# Altium PCB high-spped-thermocouple-logger_panel.PcbDoc (part 1 of 2)
Units mm, origin at the board's own origin, x right, y up, seen from the top; angles counter-clockwise.
Board outline 200.2 x 200.2 mm, 4 copper layers (Top Layer, GND Layer, VCC Layer, Bottom Layer), stack 1.55 mm thick; 2 components, 0 nets, 0 pads, 0 vias.
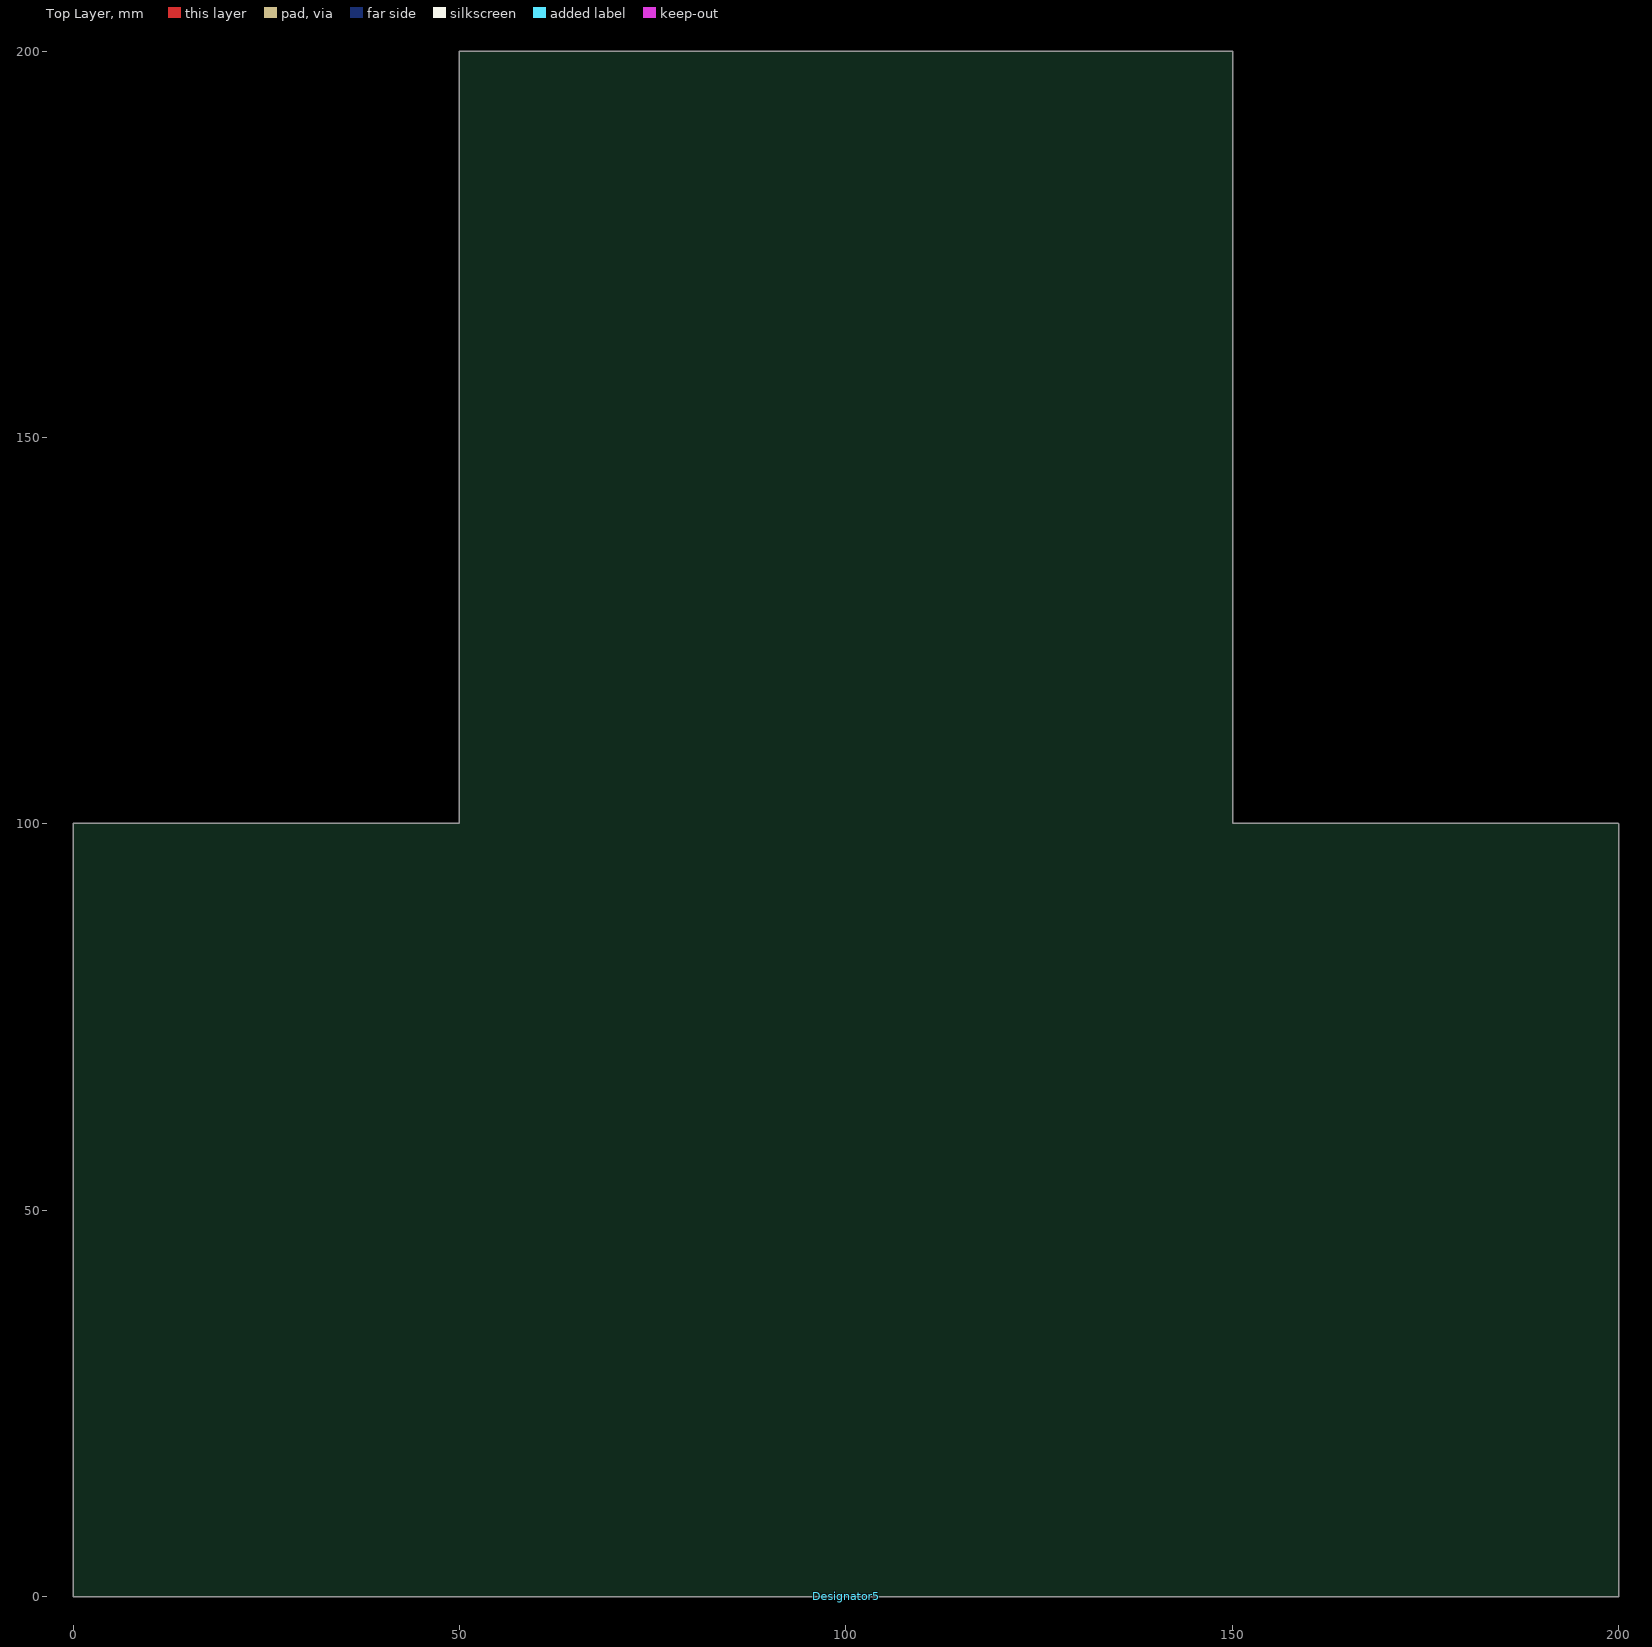
[diagram p0: Top Layer view]
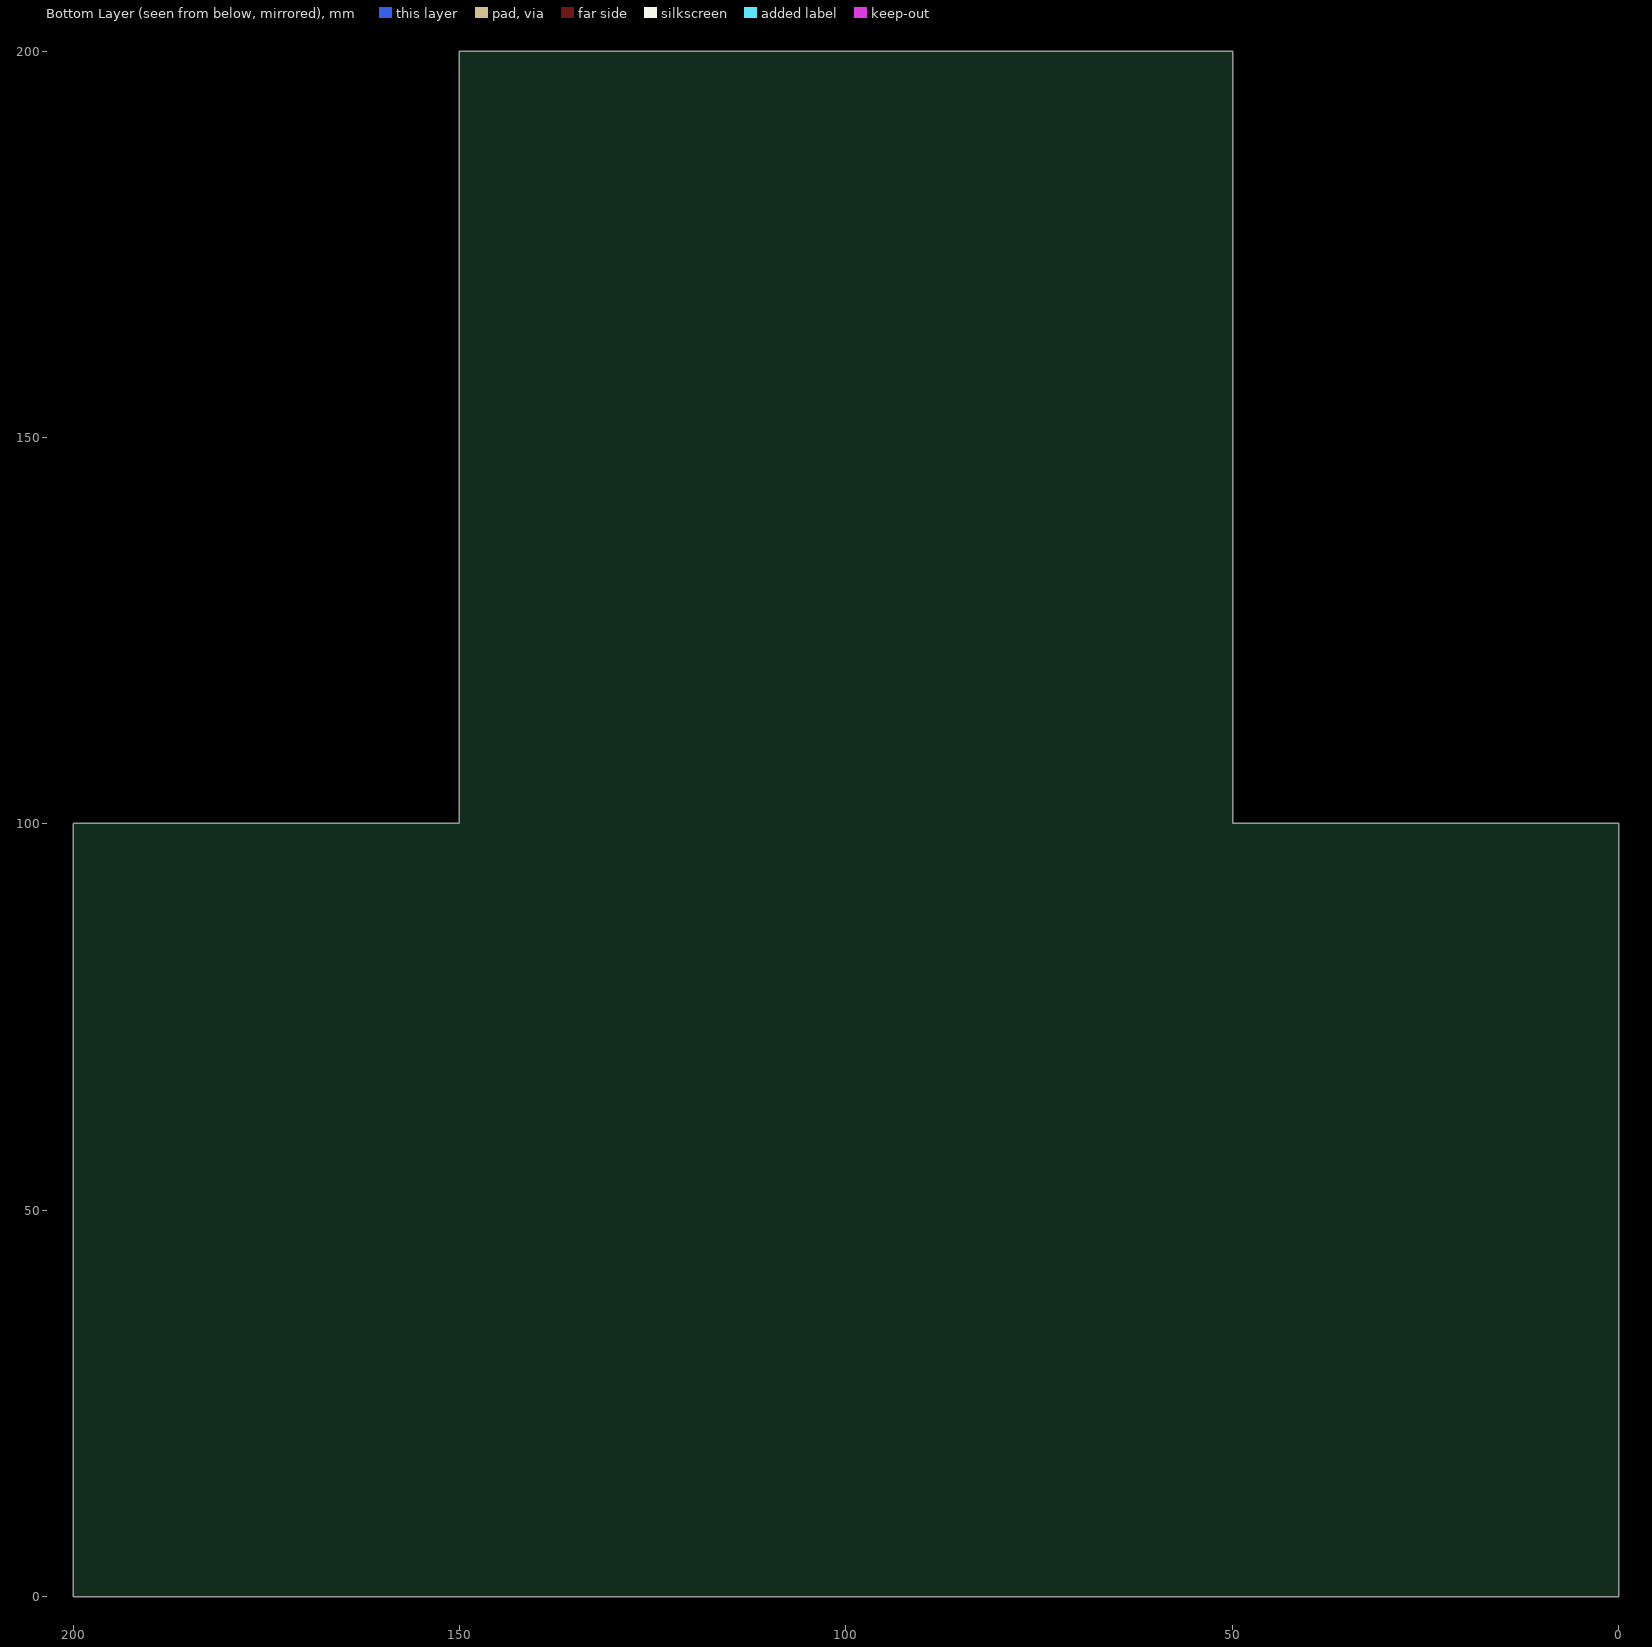
[diagram p1: Bottom Layer view, seen from below]
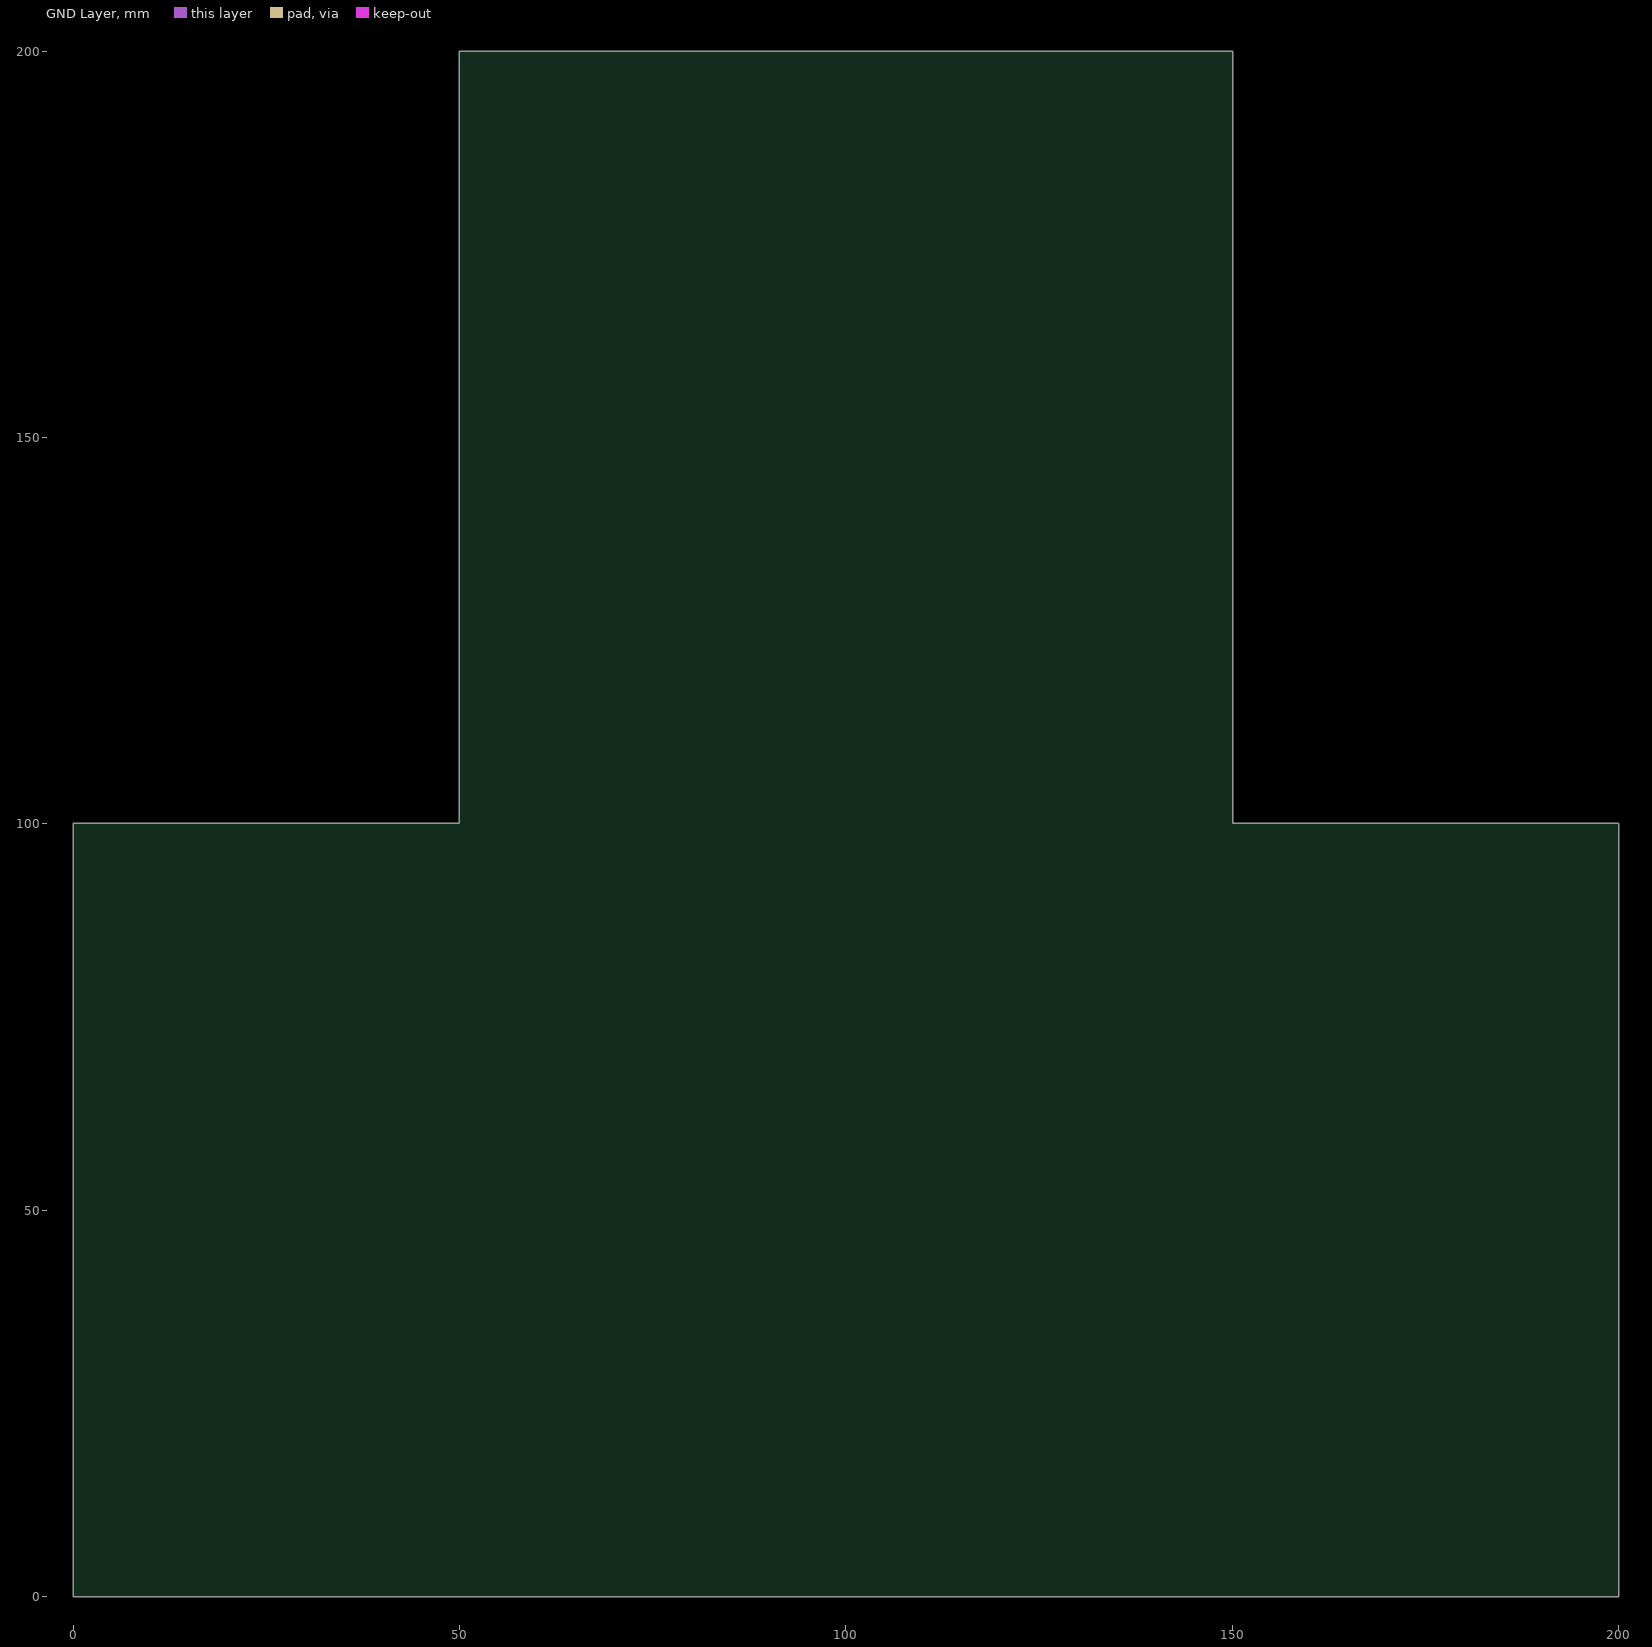
[diagram p2: GND Layer]
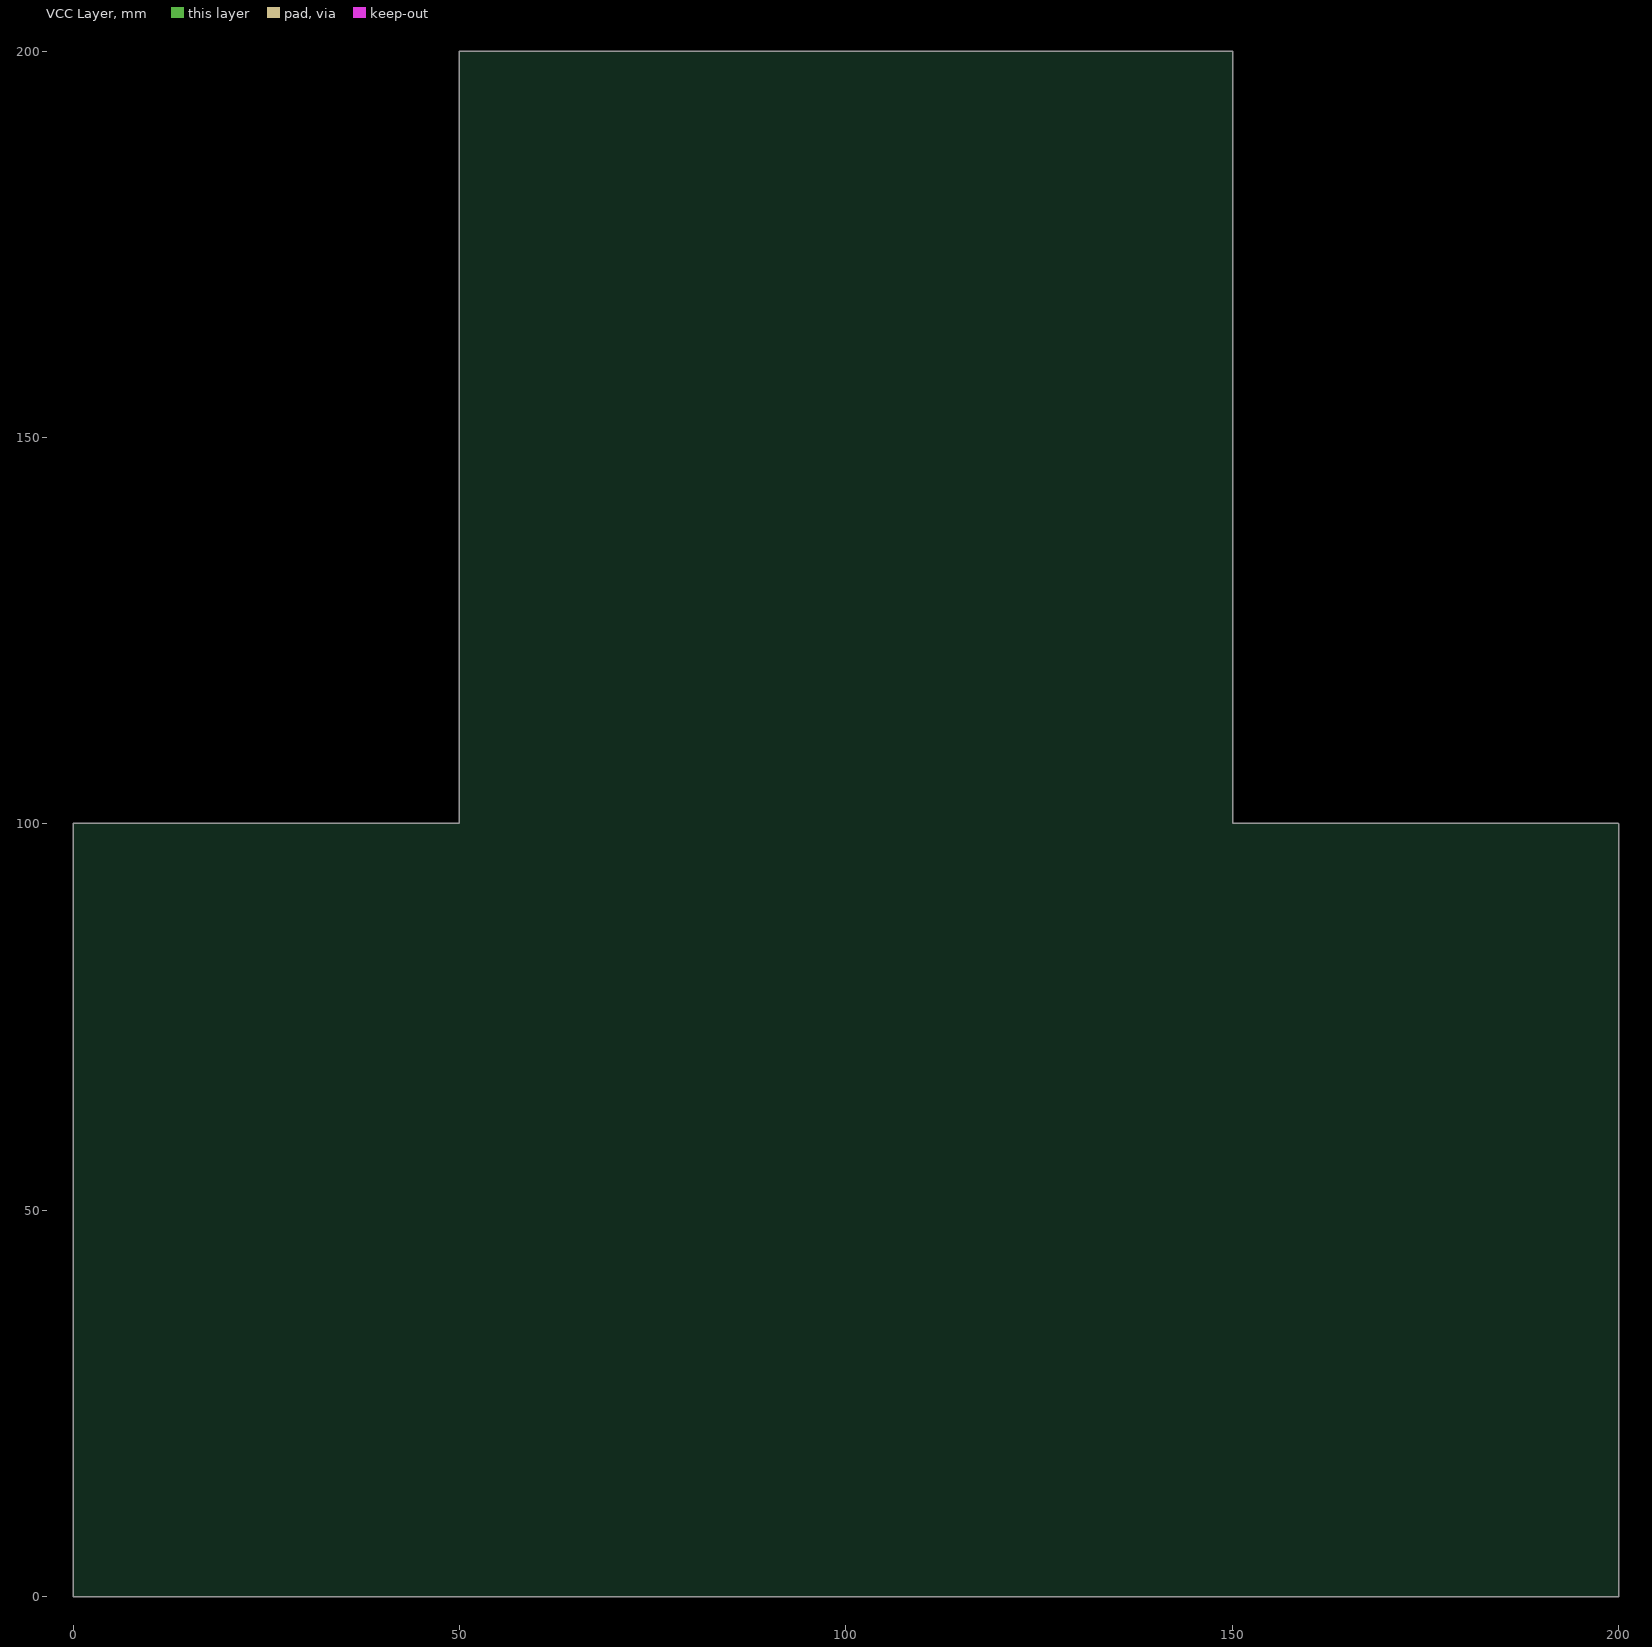
[diagram p3: VCC Layer]

## Layer stack, top to bottom
Top Solder Mask: solder mask 0.005, Solder Resist, Dk 3.5
Top Layer: signal copper 0.035
Dielectric 1: prepreg 0.35, FR-4, Dk 4.2
GND Layer: signal copper 0.035
Dielectric 3: core 0.71, FR-4, Dk 4.2
VCC Layer: signal copper 0.035
Dielectric 2: prepreg 0.35, FR-4, Dk 4.2
Bottom Layer: signal copper 0.035
Bottom Solder Mask: solder mask 0.005, Solder Resist, Dk 3.5

## Board outline
-0.1,0 ccw(c0,0) 0,-0.1 50,-0.1 150,-0.1 200,-0.1 ccw(c200,0) 200.1,0 200.1,100 200,100.1 150.1,100.1 150.1,200 ccw(c150,200) 150,200.1 50,200.1 ccw(c50,200) 49.9,200 49.9,100.1 0,100.1 ccw(c0,100) -0.1,100

## Design rules (kind name [scope] priority, off if disabled: settings)
AssemblyTestPointUsage [All] p1 off: valid=2 // Not used
AssemblyTestpoint AssemblyTestpoint_THT [(IsVia) Or (IsPad And OnMultiLayer)] p1: testpointundercomponent=TRUE minsize=0 maxsize=100 preferedsize=0 minholesize=0 maxholesize=100 preferedholesize=0 testpointgrid=0.025 usegrid=FALSE gridtolerance=0 allowsidetop=TRUE allowsidebottom=TRUE minspacing=2.54 // THT testpoints (component pads)
AssemblyTestpoint AssemblyTestpoint_SMD [(IsPad And (OnTopLayer Or OnBottomLayer)) and not(HasFootprint('FXPSWITCH_PAD') or HasFootprint ('FXPSWITCH_PAD_ALT1'))] p2: testpointundercomponent=TRUE minsize=1 maxsize=100 preferedsize=0 minholesize=0 maxholesize=100 preferedholesize=0 testpointgrid=0.025 usegrid=FALSE gridtolerance=0 allowsidetop=TRUE allowsidebottom=TRUE minspacing=2.54 padholecenterclearance=1 // SMD testpoints except present switch
AssemblyTestpoint [All] p3 off: testpointundercomponent=TRUE minsize=1.016 maxsize=2.54 preferedsize=1.524 minholesize=0 maxholesize=1.016 preferedholesize=0.813 testpointgrid=0.025 usegrid=TRUE gridtolerance=0 allowsidetop=TRUE allowsidebottom=TRUE
BoardOutlineClearance X_BoardOutlineClearance [HasFootprint('MOUSE_BITES_3X_2_4MM') or  HasFootprint('MOUSE_BITES_5X_2_4MM') or HasFootprint('IN_TAB_2_4_EXT')] p1: gap=0 ignorepadtopadclearanceinfootprint=FALSE // Excluded components
BoardOutlineClearance [All] p2: gap=0.3 ignorepadtopadclearanceinfootprint=FALSE
Clearance "NPT Hole" [(InPadClass('NPTH'))] p1: gap=0.3 ignorepadtopadclearanceinfootprint=FALSE except(0: Arc-Hole Track-Hole SMDPad-Hole THPad-Hole Via-Hole Fill-Hole Poly-Hole Region-Hole Text-Hole) // Copper Clearance to NPT Hole
Clearance [All] p2: gap=0.2 ignorepadtopadclearanceinfootprint=FALSE except(0: Arc-Hole Track-Hole SMDPad-Hole THPad-Hole Via-Hole Fill-Hole Poly-Hole Region-Hole Text-Hole)
ComponentClearance [Not (HasFootprint('PASTE_STENCIL')) vs Not (HasFootprint('PASTE_STENCIL'))] p1: gap=0.25 collisioncheckmode=3 verticalgap=0.25 showdistances=TRUE
FabricationTestPointUsage [All] p1 off: valid=0 allowmultiple=FALSE
FabricationTestpoint [All] p1 off: side=3 testpointundercomponent=TRUE minsize=1.016 maxsize=2.54 preferedsize=1.524 minholesize=0 maxholesize=1.016 preferedholesize=0.813 testpointgrid=0.025 allowsidetop=TRUE allowsidebottom=TRUE usegrid=TRUE gridtolerance=0
Height [All] p1: minheight=0 maxheight=80 prefheight=7
HoleSize [All] p1: absolutevalues=TRUE maxlimit=6 minlimit=0.35 maxpercent=80.000 minpercent=20.000
HoleToHoleClearance [All] p1: gap=0.25 allowstackedmicrovias=TRUE
MinimumAnnularRing [All] p1: minimumring=0.2
MinimumSolderMaskSliver [All] p1: minsoldermaskwidth=0.07
PlaneClearance [All] p1: clearance=0.15
PlaneConnect [All] p1: planeconnectstyle=Relief reliefexpansion=0.5 reliefentries=4 reliefconductorwidth=0.25 reliefairgap=0.25
PolygonConnect "Via Connect" [IsVia] p1: connectstyle=Direct reliefconductorwidth=0.254 reliefentries=4 polygonreliefangle="90 Angle" airgapwidth=0.254 // Via connection style
PolygonConnect [All] p2: connectstyle=Relief reliefconductorwidth=0.25 reliefentries=4 polygonreliefangle="90 Angle" airgapwidth=0.25
RoutingCorners [All] p1: cornerstyle=45-Degree minsetback=2.5 maxsetback=2.5
RoutingVias [All] p1: holewidth=0.4 width=0.8 viastyle="Through Hole" minholewidth=0.2 minwidth=0.6 maxholewidth=1 maxwidth=1.6 useviatemplates=TRUE viatemplateguid#1={26E1B80A-D5C0-4505-9623-F9CB59458B7C} viatemplateguid#2={36E1CC21-96E2-49A4-88B6-F2B68A4AE673} viatemplateguid#3={0111366E-BFF6-48C7-B537-6C96D691991D} viatemplateguid#4={0E0C0ADB-85E7-4A3B-837A-9DB01CC425C1} viatemplateguid#5={2AE59D33-7222-4D26-9EBE-4F327D78EEDC} viatemplateguid#6={04F958C5-3098-48F3-841F-9266846BFB57} viatemplateguid#7={3EBD0A92-59C6-4A03-9F1B-9C85124118A6} viatemplateguid#8={D374DE30-929E-4757-A35D-CCDF97954E77} viatemplateguid#9={7387BB7D-B2C7-482F-BFEA-A07FA82CF54E} viatemplatename#1=v50h15m22 viatemplatename#2=v60h20m28 viatemplatename#3=v80h40m48 viatemplatename#4=v110h70m78 viatemplatename#5=v140h90 viatemplatename#6=v160h100m108 viatemplatename#7=v170h110 viatemplatename#8=v200h130 viatemplatename#9=v260h150
SMDEntry [All] p1: side=TRUE corner=FALSE anyangle=FALSE
SMDEntry ResistorArray_Exit [HasFootprint('CAC-50P200X100-8M')] p2: side=TRUE corner=FALSE anyangle=FALSE
SMDToCorner ResistorArray_NeckDown [HasFootprint('CAC-50P200X100-8M')] p1: distance=78740
SilkToSilkClearance [All] p1: silktosilkclearance=0.1
SilkToSolderMaskClearance [IsPad] p1: minsilkscreentomaskgap=0.1 clearancetoexposedcopper=FALSE
SolderMaskExpansion "PTH Via" [IsVia] p1: expansion=0.075 istentingtop=FALSE soldermaskfromhole=TRUE
SolderMaskExpansion [All] p2: expansion=0.1 istentingtop=FALSE
Width [All] p1: maxlimit=5 minlimit=0.15 preferedwidth=0.3
16 further rules are at their usual default settings.

## Components (designator, comment, footprint, x,y, rotation, side; value= is the part's Value field where it differs from the comment)
Designator4 "Comment" PCB_INFO_4L 0,-42 r0 top
Designator5 "Comment" PASTE_STENCIL 100,0 r0 top

## Footprints (in the part's own frame and the unit in brackets; to place one, negate y for a bottom-side part, rotate by r counter-clockwise, add the part's x,y. Pads: shape width x height; smd on the part's side, far side on the other; paste and mask are expansions set on the pad)
PASTE_STENCIL [mm] "Solder Paste Stencil"
PCB_INFO_4L [mm] "PCB Info table for 4L PCB, with additional info."

## Part data
Designator4: library part 000-TABPCB100
Designator5: library part 000-STENCIL100

## Nets (pads, with @x,y where several pads share a name; then routed paths per layer and width w, separated by ;. In a path a pad name is that pad's centre, name@x,y a point inside that pad or via, vN(x,y) a via of type N, cw(c..) or ccw(c..) an arc to the next point about the centre after c; other vN are vias at no path point)

## Silkscreen, mask and mechanical layers (free items; w line width, h text height)
Route Tool Path:
  lines w0.5: 100,0 150,0 ; 150,0 50,0 0,0 0,100 50,100 50,200 150,200 150,100 200,100 200,0 150,0
Mfg Info:
  drawing of 168 lines, arcs and shapes, not listed
  text "Layer" at 1.968,-53.17 h1.52
  text "Name" at 12.38,-53.17 h1.52
  text "Material" at 41.836,-53.17 h1.52
  text "Thickness" at 63.674,-53.17 h1.52
  text "Constant" at 80.18,-53.17 h1.52
  text "Top Silkscreen" at 12.38,-56.218 h1.52
  text "Top Solder Mask" at 12.38,-59.266 h1.52
  text "Solder Resist" at 41.836,-59.266 h1.52
  text "0.005mm" at 63.674,-59.266 h1.52
  text "3.5" at 80.18,-59.266 h1.52
  text "1" at 1.968,-62.314 h1.52
  text "Top Layer" at 12.38,-62.314 h1.52
  text "0.035mm" at 63.674,-62.314 h1.52
  text "Dielectric 1" at 12.38,-65.362 h1.52
  text "FR-4" at 41.836,-65.362 h1.52
  text "0.350mm" at 63.674,-65.362 h1.52
  text "4.2" at 80.18,-65.362 h1.52
  text "2" at 1.968,-68.41 h1.52
  text "GND Layer" at 12.38,-68.41 h1.52
  text "0.035mm" at 63.674,-68.41 h1.52
  text "Dielectric 3" at 12.38,-71.458 h1.52
  text "FR-4" at 41.836,-71.458 h1.52
  text "0.710mm" at 63.674,-71.458 h1.52
  text "4.2" at 80.18,-71.458 h1.52
  text "3" at 1.968,-74.506 h1.52
  text "VCC Layer" at 12.38,-74.506 h1.52
  text "0.035mm" at 63.674,-74.506 h1.52
  text "Dielectric 2" at 12.38,-77.554 h1.52
  text "FR-4" at 41.836,-77.554 h1.52
  text "0.350mm" at 63.674,-77.554 h1.52
  text "4.2" at 80.18,-77.554 h1.52
  text "4" at 1.968,-80.602 h1.52
  text "Bottom Layer" at 12.38,-80.602 h1.52
  text "0.035mm" at 63.674,-80.602 h1.52
  text "Bottom Solder Mask" at 12.38,-83.65 h1.52
  text "Solder Resist" at 41.836,-83.65 h1.52
  text "0.005mm" at 63.674,-83.65 h1.52
  text "3.5" at 80.18,-83.65 h1.52
  text "Bottom Silkscreen" at 12.38,-86.698 h1.52
  text "Total board thickness:" at 1.968,-89.746 h1.52
  text "1.560mm" at 63.674,-89.746 h1.52
  text "P" at 138.774,-119.59 h1.73
  text "A" at 139.503,-119.59 h1.73
  text "N" at 140.314,-119.59 h1.73
  text "E" at 141.286,-119.59 h1.73
  text "L" at 142.015,-119.59 h1.73
  text "T" at 142.988,-119.59 h1.73
  text "H" at 143.717,-119.59 h1.73
  text "I" at 144.608,-119.59 h1.73
  text "C" at 145.013,-119.59 h1.73
  text "K" at 145.824,-119.59 h1.73
  text "N" at 146.553,-119.59 h1.73
  text "E" at 147.525,-119.59 h1.73
  text "S" at 148.255,-119.59 h1.73
  text "S" at 148.903,-119.59 h1.73
  text "A" at 163.002,-119.59 h1.73
  text "P" at 163.812,-119.59 h1.73
  text "P" at 164.541,-119.59 h1.73
  text "R" at 165.271,-119.59 h1.73
  text "O" at 166.081,-119.59 h1.73
  text "X" at 167.053,-119.59 h1.73
  text "I" at 167.783,-119.59 h1.73
  text "M" at 168.188,-119.59 h1.73
  text "A" at 169.403,-119.59 h1.73
  text "T" at 170.214,-119.59 h1.73
  text "E" at 170.943,-119.59 h1.73
  text "C" at 138.774,-122.426 h1.73
  text "O" at 139.584,-122.426 h1.73
  text "P" at 140.557,-122.426 h1.73
  text "P" at 141.286,-122.426 h1.73
  text "E" at 142.015,-122.426 h1.73
  text "R" at 142.745,-122.426 h1.73
  text "T" at 143.879,-122.426 h1.73
  text "H" at 144.608,-122.426 h1.73
  text "I" at 145.5,-122.426 h1.73
  text "C" at 145.905,-122.426 h1.73
  text "K" at 146.715,-122.426 h1.73
  text "N" at 147.444,-122.426 h1.73
  text "E" at 148.417,-122.426 h1.73
  text "S" at 149.146,-122.426 h1.73
  text "S" at 149.794,-122.426 h1.73
  text "F" at 163.002,-122.426 h1.73
  text "I" at 163.65,-122.426 h1.73
  text "N" at 164.055,-122.426 h1.73
  text "A" at 165.028,-122.426 h1.73
  text "L" at 165.838,-122.426 h1.73
  text "(" at 166.81,-122.426 h1.73
  text "A" at 167.215,-122.426 h1.73
  text "F" at 168.026,-122.426 h1.73
  text "T" at 168.674,-122.426 h1.73
  text "E" at 169.403,-122.426 h1.73
  text "R" at 170.133,-122.426 h1.73
  text "P" at 171.267,-122.426 h1.73
  text "L" at 171.996,-122.426 h1.73
  text "A" at 172.644,-122.426 h1.73
  text "T" at 173.455,-122.426 h1.73
  text "I" at 174.184,-122.426 h1.73
  text "N" at 174.589,-122.426 h1.73
  text "G" at 175.562,-122.426 h1.73
  text ")" at 176.453,-122.426 h1.73
  text "I" at 138.774,-125.262 h1.73
  text "N" at 139.179,-125.262 h1.73
  text "S" at 140.152,-125.262 h1.73
  text "U" at 140.8,-125.262 h1.73
  text "L" at 141.772,-125.262 h1.73
  text "A" at 142.421,-125.262 h1.73
  text "T" at 143.231,-125.262 h1.73
  text "I" at 143.96,-125.262 h1.73
  text "O" at 144.365,-125.262 h1.73
  text "N" at 145.338,-125.262 h1.73
  text "M" at 146.634,-125.262 h1.73
  text "A" at 147.85,-125.262 h1.73
  text "T" at 148.66,-125.262 h1.73
  text "E" at 149.389,-125.262 h1.73
  text "R" at 150.118,-125.262 h1.73
  text "I" at 150.929,-125.262 h1.73
  text "A" at 151.334,-125.262 h1.73
  text "L" at 152.144,-125.262 h1.73
  text "T" at 153.117,-125.262 h1.73
  text "H" at 153.846,-125.262 h1.73
  text "I" at 154.737,-125.262 h1.73
  text "C" at 155.142,-125.262 h1.73
  text "K" at 155.953,-125.262 h1.73
  text "N" at 156.682,-125.262 h1.73
  text "E" at 157.654,-125.262 h1.73
  text "S" at 158.383,-125.262 h1.73
  text "S" at 159.032,-125.262 h1.73
  text "R" at 163.002,-125.262 h1.73
  text "E" at 163.812,-125.262 h1.73
  text "C" at 164.541,-125.262 h1.73
  text "O" at 165.352,-125.262 h1.73
  text "M" at 166.324,-125.262 h1.73
  text "M" at 167.54,-125.262 h1.73
  text "E" at 168.755,-125.262 h1.73
  text "N" at 169.484,-125.262 h1.73
  text "D" at 170.457,-125.262 h1.73
  text "E" at 171.348,-125.262 h1.73
  text "D" at 172.077,-125.262 h1.73
  text "D" at 138.774,-128.099 h1.73
  text "I" at 139.665,-128.099 h1.73
  text "E" at 140.071,-128.099 h1.73
  text "L" at 140.8,-128.099 h1.73
  text "E" at 141.448,-128.099 h1.73
  text "C" at 142.177,-128.099 h1.73
  text "T" at 142.988,-128.099 h1.73
  text "R" at 143.717,-128.099 h1.73
  text "I" at 144.527,-128.099 h1.73
  text "C" at 144.932,-128.099 h1.73
  text "C" at 146.067,-128.099 h1.73
  text "O" at 146.877,-128.099 h1.73
  text "N" at 147.85,-128.099 h1.73
  text "S" at 148.822,-128.099 h1.73
  text "T" at 149.47,-128.099 h1.73
  text "A" at 150.199,-128.099 h1.73
  text "N" at 151.01,-128.099 h1.73
  text "T" at 151.982,-128.099 h1.73
  text "S" at 152.711,-128.099 h1.73
  text "A" at 163.002,-128.099 h1.73
  text "P" at 163.812,-128.099 h1.73
  text "P" at 164.541,-128.099 h1.73
  text "R" at 165.271,-128.099 h1.73
  text "O" at 166.081,-128.099 h1.73
  text "X" at 167.053,-128.099 h1.73
  text "I" at 167.783,-128.099 h1.73
  text "M" at 168.188,-128.099 h1.73
  text "A" at 169.403,-128.099 h1.73
  text "T" at 170.214,-128.099 h1.73
  text "E" at 170.943,-128.099 h1.73
  text "M" at 138.774,-130.935 h1.73
  text "A" at 139.99,-130.935 h1.73
  text "T" at 140.8,-130.935 h1.73
  text "E" at 141.529,-130.935 h1.73
  text "R" at 142.258,-130.935 h1.73
  text "I" at 143.069,-130.935 h1.73
  text "A" at 143.474,-130.935 h1.73
  text "L" at 144.284,-130.935 h1.73
  text "S" at 144.932,-130.935 h1.73
  text "I" at 145.905,-130.935 h1.73
  text "N" at 146.31,-130.935 h1.73
  text "S" at 147.606,-130.935 h1.73
  text "T" at 148.255,-130.935 h1.73
  text "A" at 148.984,-130.935 h1.73
  text "C" at 149.794,-130.935 h1.73
  text "K" at 150.605,-130.935 h1.73
  text "U" at 151.334,-130.935 h1.73
  text "P" at 152.306,-130.935 h1.73
  text "T" at 153.36,-130.935 h1.73
  text "A" at 154.089,-130.935 h1.73
  text "B" at 154.899,-130.935 h1.73
  text "L" at 155.709,-130.935 h1.73
  text "E" at 156.358,-130.935 h1.73
  text "R" at 163.002,-130.935 h1.73
  text "E" at 163.812,-130.935 h1.73
  text "C" at 164.541,-130.935 h1.73
  text "O" at 165.352,-130.935 h1.73
  text "M" at 166.324,-130.935 h1.73
  text "M" at 167.54,-130.935 h1.73
  text "E" at 168.755,-130.935 h1.73
  text "N" at 169.484,-130.935 h1.73
  text "D" at 170.457,-130.935 h1.73
  text "E" at 171.348,-130.935 h1.73
  text "D" at 172.077,-130.935 h1.73
  text "U" at 138.774,-133.771 h1.73
  text "S" at 139.747,-133.771 h1.73
  text "E" at 140.395,-133.771 h1.73
  text "O" at 141.448,-133.771 h1.73
  text "N" at 142.421,-133.771 h1.73
  text "L" at 143.393,-133.771 h1.73
  text "Y" at 144.041,-133.771 h1.73
  text "U" at 145.095,-133.771 h1.73
  text "L" at 146.067,-133.771 h1.73
  text "9" at 146.715,-133.771 h1.73
  text "4" at 147.444,-133.771 h1.73
  text "V" at 148.498,-133.771 h1.73
  text "-" at 149.308,-133.771 h1.73
  text "0" at 149.794,-133.771 h1.73
  text "M" at 150.848,-133.771 h1.73
  text "A" at 152.063,-133.771 h1.73
  text "T" at 152.873,-133.771 h1.73
  text "E" at 153.603,-133.771 h1.73
  text "R" at 154.332,-133.771 h1.73
  text "I" at 155.142,-133.771 h1.73
  text "A" at 155.547,-133.771 h1.73
  text "L" at 156.358,-133.771 h1.73
  text "M" at 163.002,-133.771 h1.73
  text "A" at 164.217,-133.771 h1.73
  text "N" at 165.028,-133.771 h1.73
  text "D" at 166,-133.771 h1.73
  text "A" at 166.891,-133.771 h1.73
  text "T" at 167.702,-133.771 h1.73
  text "O" at 168.431,-133.771 h1.73
  text "R" at 169.403,-133.771 h1.73
  text "Y" at 170.214,-133.771 h1.73
  text "B" at 138.774,-136.607 h1.73
  text "O" at 139.584,-136.607 h1.73
  text "A" at 140.557,-136.607 h1.73
  text "R" at 141.367,-136.607 h1.73
  text "D" at 142.177,-136.607 h1.73
  text "F" at 143.393,-136.607 h1.73
  text "I" at 144.041,-136.607 h1.73
  text "N" at 144.446,-136.607 h1.73
  text "I" at 145.419,-136.607 h1.73
  text "S" at 145.824,-136.607 h1.73
  text "H" at 146.472,-136.607 h1.73
  text "L" at 163.002,-136.607 h1.73
  text "E" at 163.65,-136.607 h1.73
  text "A" at 164.379,-136.607 h1.73
  text "D" at 165.19,-136.607 h1.73
  text "F" at 166.405,-136.607 h1.73
  text "R" at 167.053,-136.607 h1.73
  text "E" at 167.864,-136.607 h1.73
  text "E" at 168.593,-136.607 h1.73
  text "H" at 169.646,-136.607 h1.73
  text "A" at 170.538,-136.607 h1.73
  text "L" at 171.348,-136.607 h1.73
  text "S" at 138.774,-139.443 h1.73
  text "O" at 139.422,-139.443 h1.73
  text "L" at 140.395,-139.443 h1.73
  text "D" at 141.043,-139.443 h1.73
  text "E" at 141.934,-139.443 h1.73
  text "R" at 142.664,-139.443 h1.73
  text "M" at 143.474,-139.443 h1.73
  text "A" at 144.689,-139.443 h1.73
  text "S" at 145.5,-139.443 h1.73
  text "K" at 146.148,-139.443 h1.73
  text "G" at 163.002,-139.443 h1.73
  text "R" at 163.893,-139.443 h1.73
  text "E" at 164.703,-139.443 h1.73
  text "E" at 165.433,-139.443 h1.73
  text "N" at 166.162,-139.443 h1.73
  text "," at 167.134,-139.443 h1.73
  text "B" at 167.783,-139.443 h1.73
  text "O" at 168.593,-139.443 h1.73
  text "T" at 169.565,-139.443 h1.73
  text "H" at 170.295,-139.443 h1.73
  text "S" at 171.51,-139.443 h1.73
  text "I" at 172.158,-139.443 h1.73
  text "D" at 172.563,-139.443 h1.73
  text "E" at 173.455,-139.443 h1.73
  text "S" at 174.184,-139.443 h1.73
  text "S" at 138.774,-142.279 h1.73
  text "O" at 139.422,-142.279 h1.73
  text "L" at 140.395,-142.279 h1.73
  text "D" at 141.043,-142.279 h1.73
  text "E" at 141.934,-142.279 h1.73
  text "R" at 142.664,-142.279 h1.73
  text "M" at 143.798,-142.279 h1.73
  text "A" at 145.013,-142.279 h1.73
  text "S" at 145.824,-142.279 h1.73
  text "K" at 146.472,-142.279 h1.73
  text "C" at 147.525,-142.279 h1.73
  text "L" at 148.336,-142.279 h1.73
  text "E" at 148.984,-142.279 h1.73
  text "A" at 149.713,-142.279 h1.73
  text "R" at 150.524,-142.279 h1.73
  text "A" at 151.334,-142.279 h1.73
  text "N" at 152.144,-142.279 h1.73
  text "C" at 153.117,-142.279 h1.73
  text "E" at 153.927,-142.279 h1.73
  text "S" at 154.656,-142.279 h1.73
  text "F" at 155.628,-142.279 h1.73
  text "O" at 156.277,-142.279 h1.73
  text "R" at 157.249,-142.279 h1.73
  text "V" at 158.383,-142.279 h1.73
  text "I" at 159.194,-142.279 h1.73
  text "A" at 159.599,-142.279 h1.73
  text "S" at 160.409,-142.279 h1.73
  text "R" at 163.002,-142.279 h1.73
  text "E" at 163.812,-142.279 h1.73
  text "C" at 164.541,-142.279 h1.73
  text "O" at 165.352,-142.279 h1.73
  text "M" at 166.324,-142.279 h1.73
  text "M" at 167.54,-142.279 h1.73
  text "E" at 168.755,-142.279 h1.73
  text "N" at 169.484,-142.279 h1.73
  text "D" at 170.457,-142.279 h1.73
  text "E" at 171.348,-142.279 h1.73
  text "D" at 172.077,-142.279 h1.73
  text "M" at 138.774,-145.196 h1.73
  text "A" at 139.99,-145.196 h1.73
  text "X" at 140.8,-145.196 h1.73
  text "I" at 141.529,-145.196 h1.73
  text "M" at 141.934,-145.196 h1.73
  text "U" at 143.15,-145.196 h1.73
  text "M" at 144.122,-145.196 h1.73
  text "C" at 145.662,-145.196 h1.73
  text "L" at 146.472,-145.196 h1.73
  text "E" at 147.12,-145.196 h1.73
  text "A" at 147.85,-145.196 h1.73
  text "R" at 148.66,-145.196 h1.73
  text "A" at 149.47,-145.196 h1.73
  text "N" at 150.28,-145.196 h1.73
  text "C" at 151.253,-145.196 h1.73
  text "E" at 152.063,-145.196 h1.73
  text "O" at 153.117,-145.196 h1.73
  text "F" at 154.089,-145.196 h1.73
  text "S" at 155.061,-145.196 h1.73
  text "O" at 155.709,-145.196 h1.73
  text "L" at 156.682,-145.196 h1.73
  text "D" at 157.33,-145.196 h1.73
  text "E" at 158.221,-145.196 h1.73
  text "R" at 158.951,-145.196 h1.73
  text "1" at 163.002,-146.168 h1.73
  text "5" at 163.731,-146.168 h1.73
  text "0" at 164.46,-146.168 h1.73
  text "U" at 165.514,-146.168 h1.73
  text "M" at 166.486,-146.168 h1.73
  text "I" at 168.026,-146.168 h1.73
  text "F" at 168.431,-146.168 h1.73
  text "N" at 169.403,-146.168 h1.73
  text "O" at 170.376,-146.168 h1.73
  text "T" at 171.348,-146.168 h1.73
  text "S" at 172.401,-146.168 h1.73
  text "P" at 173.05,-146.168 h1.73
  text "E" at 173.779,-146.168 h1.73
  text "C" at 174.508,-146.168 h1.73
  text "I" at 175.318,-146.168 h1.73
  text "F" at 175.724,-146.168 h1.73
  text "I" at 176.372,-146.168 h1.73
  text "E" at 176.777,-146.168 h1.73
  text "D" at 177.506,-146.168 h1.73
  text "O" at 178.722,-146.168 h1.73
  text "T" at 179.694,-146.168 h1.73
  text "H" at 180.423,-146.168 h1.73
  text "E" at 181.315,-146.168 h1.73
  text "R" at 182.044,-146.168 h1.73
  text "W" at 182.854,-146.168 h1.73
  text "I" at 184.151,-146.168 h1.73
  text "S" at 184.556,-146.168 h1.73
  text "E" at 185.204,-146.168 h1.73
  text "M" at 138.774,-147.141 h1.73
  text "A" at 139.99,-147.141 h1.73
  text "S" at 140.8,-147.141 h1.73
  text "K" at 141.448,-147.141 h1.73
  text "F" at 142.502,-147.141 h1.73
  text "R" at 143.15,-147.141 h1.73
  text "O" at 143.96,-147.141 h1.73
  text "M" at 144.932,-147.141 h1.73
  text "V" at 146.472,-147.141 h1.73
  text "I" at 147.282,-147.141 h1.73
  text "A" at 147.687,-147.141 h1.73
  text "F" at 148.822,-147.141 h1.73
  text "I" at 149.47,-147.141 h1.73
  text "N" at 149.875,-147.141 h1.73
  text "A" at 150.848,-147.141 h1.73
  text "L" at 151.658,-147.141 h1.73
  text "H" at 152.63,-147.141 h1.73
  text "O" at 153.522,-147.141 h1.73
  text "L" at 154.494,-147.141 h1.73
  text "E" at 155.142,-147.141 h1.73
  text "E" at 156.196,-147.141 h1.73
  text "D" at 156.925,-147.141 h1.73
  text "G" at 157.816,-147.141 h1.73
  text "E" at 158.708,-147.141 h1.73
  text "R" at 138.774,-150.058 h1.73
  text "E" at 139.584,-150.058 h1.73
  text "M" at 140.314,-150.058 h1.73
  text "O" at 141.529,-150.058 h1.73
  text "V" at 142.502,-150.058 h1.73
  text "I" at 143.312,-150.058 h1.73
  text "N" at 143.717,-150.058 h1.73
  text "G" at 144.689,-150.058 h1.73
  text "S" at 145.905,-150.058 h1.73
  text "O" at 146.553,-150.058 h1.73
  text "L" at 147.525,-150.058 h1.73
  text "D" at 148.174,-150.058 h1.73
  text "E" at 149.065,-150.058 h1.73
  text "R" at 149.794,-150.058 h1.73
  text "M" at 150.605,-150.058 h1.73
  text "A" at 151.82,-150.058 h1.73
  text "S" at 152.63,-150.058 h1.73
  text "K" at 153.279,-150.058 h1.73
  text "B" at 154.332,-150.058 h1.73
  text "E" at 155.142,-150.058 h1.73
  text "T" at 155.872,-150.058 h1.73
  text "W" at 156.601,-150.058 h1.73
  text "E" at 157.897,-150.058 h1.73
  text "E" at 158.627,-150.058 h1.73
  text "N" at 159.356,-150.058 h1.73
  text "P" at 163.002,-151.03 h1.73
  text "O" at 163.731,-151.03 h1.73
  text "S" at 164.703,-151.03 h1.73
  text "S" at 165.352,-151.03 h1.73
  text "I" at 166,-151.03 h1.73
  text "B" at 166.405,-151.03 h1.73
  text "L" at 167.215,-151.03 h1.73
  text "E" at 167.864,-151.03 h1.73
  text "I" at 168.917,-151.03 h1.73
  text "F" at 169.322,-151.03 h1.73
  text "T" at 170.295,-151.03 h1.73
  text "H" at 171.024,-151.03 h1.73
  text "E" at 171.915,-151.03 h1.73
  text "P" at 172.969,-151.03 h1.73
  text "A" at 173.698,-151.03 h1.73
  text "D" at 174.508,-151.03 h1.73
  text "S" at 175.724,-151.03 h1.73
  text "P" at 176.372,-151.03 h1.73
  text "A" at 177.101,-151.03 h1.73
  text "C" at 177.911,-151.03 h1.73
  text "I" at 178.722,-151.03 h1.73
  text "N" at 179.127,-151.03 h1.73
  text "G" at 180.099,-151.03 h1.73
  text "(" at 181.315,-151.03 h1.73
  text "C" at 181.72,-151.03 h1.73
  text "L" at 182.53,-151.03 h1.73
  text "E" at 183.178,-151.03 h1.73
  text "A" at 183.908,-151.03 h1.73
  text "R" at 184.718,-151.03 h1.73
  text "A" at 185.528,-151.03 h1.73
  text "N" at 186.339,-151.03 h1.73
  text "C" at 187.311,-151.03 h1.73
  text "E" at 188.121,-151.03 h1.73
  text ")" at 188.851,-151.03 h1.73
  text "I" at 189.58,-151.03 h1.73
  text "S" at 189.985,-151.03 h1.73
  text "L" at 190.957,-151.03 h1.73
  text "E" at 191.606,-151.03 h1.73
  text "S" at 192.335,-151.03 h1.73
  text "S" at 192.983,-151.03 h1.73
  text "T" at 193.955,-151.03 h1.73
  text "H" at 194.685,-151.03 h1.73
  text "A" at 195.576,-151.03 h1.73
  text "N" at 196.386,-151.03 h1.73
  text "0" at 197.683,-151.03 h1.73
  text "." at 198.412,-151.03 h1.73
  text "2" at 198.817,-151.03 h1.73
  text "9" at 199.547,-151.03 h1.73
  text "M" at 200.6,-151.03 h1.73
  text "M" at 201.815,-151.03 h1.73
  text "T" at 138.774,-152.003 h1.73
  text "H" at 139.503,-152.003 h1.73
  text "E" at 140.395,-152.003 h1.73
  text "C" at 141.448,-152.003 h1.73
  text "O" at 142.258,-152.003 h1.73
  text "M" at 143.231,-152.003 h1.73
  text "P" at 144.446,-152.003 h1.73
  text "O" at 145.176,-152.003 h1.73
  text "N" at 146.148,-152.003 h1.73
  text "E" at 147.12,-152.003 h1.73
  text "N" at 147.85,-152.003 h1.73
  text "T" at 148.822,-152.003 h1.73
  text "P" at 149.875,-152.003 h1.73
  text "A" at 150.605,-152.003 h1.73
  text "D" at 151.415,-152.003 h1.73
  text "S" at 152.306,-152.003 h1.73
  text "S" at 138.774,-154.92 h1.73
  text "O" at 139.422,-154.92 h1.73
  text "L" at 140.395,-154.92 h1.73
  text "D" at 141.043,-154.92 h1.73
  text "E" at 141.934,-154.92 h1.73
  text "R" at 142.664,-154.92 h1.73
  text "M" at 143.474,-154.92 h1.73
  text "A" at 144.689,-154.92 h1.73
  text "S" at 145.5,-154.92 h1.73
  text "K" at 146.148,-154.92 h1.73
  text "O" at 147.201,-154.92 h1.73
  text "P" at 148.174,-154.92 h1.73
  text "E" at 148.903,-154.92 h1.73
  text "N" at 149.632,-154.92 h1.73
  text "I" at 150.605,-154.92 h1.73
  text "N" at 151.01,-154.92 h1.73
  text "G" at 151.982,-154.92 h1.73
  text "R" at 153.198,-154.92 h1.73
  text "E" at 154.008,-154.92 h1.73
  text "D" at 154.737,-154.92 h1.73
  text "U" at 155.628,-154.92 h1.73
  text "C" at 156.601,-154.92 h1.73
  text "T" at 157.411,-154.92 h1.73
  text "I" at 158.14,-154.92 h1.73
  text "O" at 158.546,-154.92 h1.73
  text "N" at 159.518,-154.92 h1.73
  text "O" at 160.814,-154.92 h1.73
  text "N" at 161.787,-154.92 h1.73
  text "P" at 163.002,-155.892 h1.73
  text "O" at 163.731,-155.892 h1.73
  text "S" at 164.703,-155.892 h1.73
  text "S" at 165.352,-155.892 h1.73
  text "I" at 166,-155.892 h1.73
  text "B" at 166.405,-155.892 h1.73
  text "L" at 167.215,-155.892 h1.73
  text "E" at 167.864,-155.892 h1.73
  text "T" at 168.917,-155.892 h1.73
  text "O" at 169.646,-155.892 h1.73
  text "A" at 170.943,-155.892 h1.73
  text "V" at 171.753,-155.892 h1.73
  text "O" at 172.563,-155.892 h1.73
  text "I" at 173.536,-155.892 h1.73
  text "D" at 173.941,-155.892 h1.73
  text "E" at 175.156,-155.892 h1.73
  text "X" at 175.886,-155.892 h1.73
  text "P" at 176.615,-155.892 h1.73
  text "O" at 177.344,-155.892 h1.73
  text "S" at 178.317,-155.892 h1.73
  text "E" at 178.965,-155.892 h1.73
  text "D" at 179.694,-155.892 h1.73
  text "C" at 180.91,-155.892 h1.73
  text "O" at 181.72,-155.892 h1.73
  text "P" at 182.692,-155.892 h1.73
  text "P" at 183.421,-155.892 h1.73
  text "E" at 184.151,-155.892 h1.73
  text "R" at 184.88,-155.892 h1.73
  text "F" at 138.774,-156.864 h1.73
  text "I" at 139.422,-156.864 h1.73
  text "D" at 139.828,-156.864 h1.73
  text "U" at 140.719,-156.864 h1.73
  text "C" at 141.691,-156.864 h1.73
  text "I" at 142.502,-156.864 h1.73
  text "A" at 142.907,-156.864 h1.73
  text "L" at 143.717,-156.864 h1.73
  text "M" at 144.689,-156.864 h1.73
  text "A" at 145.905,-156.864 h1.73
  text "R" at 146.715,-156.864 h1.73
  text "K" at 147.525,-156.864 h1.73
  text "S" at 148.255,-156.864 h1.73
  text "S" at 138.774,-159.7 h1.73
  text "I" at 139.422,-159.7 h1.73
  text "L" at 139.828,-159.7 h1.73
  text "K" at 140.476,-159.7 h1.73
  text "S" at 141.205,-159.7 h1.73
  text "C" at 141.853,-159.7 h1.73
  text "R" at 142.664,-159.7 h1.73
  text "E" at 143.474,-159.7 h1.73
  text "E" at 144.203,-159.7 h1.73
  text "N" at 144.932,-159.7 h1.73
  text "W" at 163.002,-159.7 h1.73
  text "H" at 164.298,-159.7 h1.73
  text "I" at 165.19,-159.7 h1.73
  text "T" at 165.595,-159.7 h1.73
  text "E" at 166.324,-159.7 h1.73
  text "," at 167.053,-159.7 h1.73
  text "T" at 167.702,-159.7 h1.73
  text "O" at 168.431,-159.7 h1.73
  text "P" at 169.403,-159.7 h1.73
  text "O" at 170.457,-159.7 h1.73
  text "N" at 171.429,-159.7 h1.73
  text "L" at 172.401,-159.7 h1.73
  text "Y" at 173.05,-159.7 h1.73
  text "S" at 138.774,-162.617 h1.73
  text "I" at 139.422,-162.617 h1.73
  text "L" at 139.828,-162.617 h1.73
  text "K" at 140.476,-162.617 h1.73
  text "S" at 141.205,-162.617 h1.73
  text "C" at 141.853,-162.617 h1.73
  text "R" at 142.664,-162.617 h1.73
  text "E" at 143.474,-162.617 h1.73
  text "E" at 144.203,-162.617 h1.73
  text "N" at 144.932,-162.617 h1.73
  text "O" at 146.229,-162.617 h1.73
  text "V" at 147.201,-162.617 h1.73
  text "E" at 148.012,-162.617 h1.73
  text "R" at 148.741,-162.617 h1.73
  text "L" at 149.551,-162.617 h1.73
  text "A" at 150.199,-162.617 h1.73
  text "P" at 151.01,-162.617 h1.73
  text "P" at 151.739,-162.617 h1.73
  text "I" at 152.468,-162.617 h1.73
  text "N" at 152.873,-162.617 h1.73
  text "G" at 153.846,-162.617 h1.73
  text "T" at 155.061,-162.617 h1.73
  text "H" at 155.791,-162.617 h1.73
  text "E" at 156.682,-162.617 h1.73
  text "B" at 157.735,-162.617 h1.73
  text "A" at 158.546,-162.617 h1.73
  text "S" at 159.356,-162.617 h1.73
  text "E" at 160.004,-162.617 h1.73
  text "Y" at 163.002,-163.59 h1.73
  text "O" at 163.731,-163.59 h1.73
  text "U" at 164.703,-163.59 h1.73
  text "C" at 166,-163.59 h1.73
  text "A" at 166.81,-163.59 h1.73
  text "N" at 167.621,-163.59 h1.73
  text "C" at 168.917,-163.59 h1.73
  text "U" at 169.727,-163.59 h1.73
  text "T" at 170.7,-163.59 h1.73
  text "T" at 171.753,-163.59 h1.73
  text "H" at 172.482,-163.59 h1.73
  text "E" at 173.374,-163.59 h1.73
  text "O" at 174.427,-163.59 h1.73
  text "V" at 175.399,-163.59 h1.73
  text "E" at 176.21,-163.59 h1.73
  text "R" at 176.939,-163.59 h1.73
  text "L" at 177.749,-163.59 h1.73
  text "A" at 178.398,-163.59 h1.73
  text "P" at 179.208,-163.59 h1.73
  text "P" at 179.937,-163.59 h1.73
  text "I" at 180.666,-163.59 h1.73
  text "N" at 181.072,-163.59 h1.73
  text "G" at 182.044,-163.59 h1.73
  text "S" at 183.259,-163.59 h1.73
  text "I" at 183.908,-163.59 h1.73
  text "L" at 184.313,-163.59 h1.73
  text "K" at 184.961,-163.59 h1.73
  text "S" at 185.69,-163.59 h1.73
  text "C" at 186.339,-163.59 h1.73
  text "R" at 187.149,-163.59 h1.73
  text "E" at 187.959,-163.59 h1.73
  text "E" at 188.688,-163.59 h1.73
  text "N" at 189.418,-163.59 h1.73
  text "C" at 138.774,-164.562 h1.73
  text "O" at 139.584,-164.562 h1.73
  text "P" at 140.557,-164.562 h1.73
  text "P" at 141.286,-164.562 h1.73
  text "E" at 142.015,-164.562 h1.73
  text "R" at 142.745,-164.562 h1.73
  text "O" at 143.879,-164.562 h1.73
  text "R" at 144.851,-164.562 h1.73
  text "T" at 145.986,-164.562 h1.73
  text "H" at 146.715,-164.562 h1.73
  text "E" at 147.606,-164.562 h1.73
  text "B" at 148.66,-164.562 h1.73
  text "O" at 149.47,-164.562 h1.73
  text "A" at 150.443,-164.562 h1.73
  text "R" at 151.253,-164.562 h1.73
  text "D" at 152.063,-164.562 h1.73
  text "O" at 153.279,-164.562 h1.73
  text "U" at 154.251,-164.562 h1.73
  text "T" at 155.223,-164.562 h1.73
  text "L" at 155.953,-164.562 h1.73
  text "I" at 156.601,-164.562 h1.73
  text "N" at 157.006,-164.562 h1.73
  text "E" at 157.978,-164.562 h1.73
  text "A" at 138.774,-167.479 h1.73
  text "D" at 139.584,-167.479 h1.73
  text "D" at 140.476,-167.479 h1.73
  text "I" at 141.367,-167.479 h1.73
  text "N" at 141.772,-167.479 h1.73
  text "G" at 142.745,-167.479 h1.73
  text "U" at 143.96,-167.479 h1.73
  text "L" at 144.932,-167.479 h1.73
  text "L" at 145.905,-167.479 h1.73
  text "O" at 146.553,-167.479 h1.73
  text "G" at 147.525,-167.479 h1.73
  text "O" at 148.417,-167.479 h1.73
  text "," at 149.389,-167.479 h1.73
  text "F" at 150.037,-167.479 h1.73
  text "I" at 150.686,-167.479 h1.73
  text "L" at 151.091,-167.479 h1.73
  text "E" at 151.739,-167.479 h1.73
  text "N" at 152.468,-167.479 h1.73
  text "U" at 153.441,-167.479 h1.73
  text "M" at 154.413,-167.479 h1.73
  text "B" at 155.628,-167.479 h1.73
  text "E" at 156.439,-167.479 h1.73
  text "R" at 157.168,-167.479 h1.73
  text "O" at 158.302,-167.479 h1.73
  text "R" at 159.275,-167.479 h1.73
  text "O" at 163.002,-168.452 h1.73
  text "K" at 163.974,-168.452 h1.73
  text "," at 164.703,-168.452 h1.73
  text "T" at 165.352,-168.452 h1.73
  text "O" at 166.081,-168.452 h1.73
  text "S" at 167.377,-168.452 h1.73
  text "I" at 168.026,-168.452 h1.73
  text "L" at 168.431,-168.452 h1.73
  text "K" at 169.079,-168.452 h1.73
  text "S" at 169.808,-168.452 h1.73
  text "C" at 170.457,-168.452 h1.73
  text "R" at 171.267,-168.452 h1.73
  text "E" at 172.077,-168.452 h1.73
  text "E" at 172.807,-168.452 h1.73
  text "N" at 173.536,-168.452 h1.73
  text "O" at 174.832,-168.452 h1.73
  text "R" at 175.805,-168.452 h1.73
  text "S" at 176.939,-168.452 h1.73
  text "O" at 177.587,-168.452 h1.73
  text "L" at 178.56,-168.452 h1.73
  text "D" at 179.208,-168.452 h1.73
  text "E" at 180.099,-168.452 h1.73
  text "R" at 180.829,-168.452 h1.73
  text "M" at 181.639,-168.452 h1.73
  text "A" at 182.854,-168.452 h1.73
  text "S" at 183.665,-168.452 h1.73
  text "K" at 184.313,-168.452 h1.73
  text "M" at 138.774,-169.424 h1.73
  text "A" at 139.99,-169.424 h1.73
  text "T" at 140.8,-169.424 h1.73
  text "E" at 141.529,-169.424 h1.73
  text "R" at 142.258,-169.424 h1.73
  text "I" at 143.069,-169.424 h1.73
  text "A" at 143.474,-169.424 h1.73
  text "L" at 144.284,-169.424 h1.73
  text "Y" at 138.774,-172.26 h1.73
  text "O" at 139.503,-172.26 h1.73
  text "U" at 140.476,-172.26 h1.73
  text "R" at 141.448,-172.26 h1.73
  text "L" at 142.583,-172.26 h1.73
  text "O" at 143.231,-172.26 h1.73
  text "G" at 144.203,-172.26 h1.73
  text "O" at 145.095,-172.26 h1.73
  text "I" at 146.391,-172.26 h1.73
  text "N" at 146.796,-172.26 h1.73
  text "T" at 148.093,-172.26 h1.73
  text "H" at 148.822,-172.26 h1.73
  text "E" at 149.713,-172.26 h1.73
  text "S" at 150.767,-172.26 h1.73
  text "I" at 151.415,-172.26 h1.73
  text "L" at 151.82,-172.26 h1.73
  text "K" at 152.468,-172.26 h1.73
  text "S" at 153.198,-172.26 h1.73
  text "C" at 153.846,-172.26 h1.73
  text "R" at 154.656,-172.26 h1.73
  text "E" at 155.466,-172.26 h1.73
  text "E" at 156.196,-172.26 h1.73
  text "N" at 156.925,-172.26 h1.73
  text "L" at 158.221,-172.26 h1.73
  text "A" at 158.87,-172.26 h1.73
  text "Y" at 159.68,-172.26 h1.73
  text "E" at 160.409,-172.26 h1.73
  text "R" at 161.139,-172.26 h1.73
  text "O" at 163.002,-172.26 h1.73
  text "K" at 163.974,-172.26 h1.73
  text "," at 164.703,-172.26 h1.73
  text "I" at 165.352,-172.26 h1.73
  text "F" at 165.757,-172.26 h1.73
  text "T" at 166.729,-172.26 h1.73
  text "H" at 167.459,-172.26 h1.73
  text "E" at 168.35,-172.26 h1.73
  text "R" at 169.079,-172.26 h1.73
  text "E" at 169.889,-172.26 h1.73
  text "I" at 170.943,-172.26 h1.73
  text "S" at 171.348,-172.26 h1.73
  text "E" at 172.32,-172.26 h1.73
  text "N" at 173.05,-172.26 h1.73
  text "O" at 174.022,-172.26 h1.73
  text "U" at 174.994,-172.26 h1.73
  text "G" at 175.967,-172.26 h1.73
  text "H" at 176.858,-172.26 h1.73
  text "S" at 178.073,-172.26 h1.73
  text "P" at 178.722,-172.26 h1.73
  text "A" at 179.451,-172.26 h1.73
  text "C" at 180.261,-172.26 h1.73
  text "E" at 181.072,-172.26 h1.73
  text "D" at 138.774,-175.096 h1.73
  text "R" at 139.665,-175.096 h1.73
  text "I" at 140.476,-175.096 h1.73
  text "L" at 140.881,-175.096 h1.73
  text "L" at 141.529,-175.096 h1.73
  text "D" at 142.502,-175.096 h1.73
  text "I" at 143.393,-175.096 h1.73
  text "A" at 143.798,-175.096 h1.73
  text "M" at 144.608,-175.096 h1.73
  text "E" at 145.824,-175.096 h1.73
  text "T" at 146.553,-175.096 h1.73
  text "E" at 147.282,-175.096 h1.73
  text "R" at 148.012,-175.096 h1.73
  text "S" at 148.822,-175.096 h1.73
  text "O" at 149.794,-175.096 h1.73
  text "F" at 150.767,-175.096 h1.73
  text "P" at 151.739,-175.096 h1.73
  text "L" at 152.468,-175.096 h1.73
  text "A" at 153.117,-175.096 h1.73
  text "T" at 153.927,-175.096 h1.73
  text "E" at 154.656,-175.096 h1.73
  text "D" at 155.385,-175.096 h1.73
  text "H" at 156.601,-175.096 h1.73
  text "O" at 157.492,-175.096 h1.73
  text "L" at 158.465,-175.096 h1.73
  text "E" at 159.113,-175.096 h1.73
  text "S" at 159.842,-175.096 h1.73
  text "F" at 163.002,-175.096 h1.73
  text "I" at 163.65,-175.096 h1.73
  text "N" at 164.055,-175.096 h1.73
  text "A" at 165.028,-175.096 h1.73
  text "L" at 165.838,-175.096 h1.73
  text "U" at 138.774,-177.932 h1.73
  text "N" at 139.747,-177.932 h1.73
  text "S" at 140.719,-177.932 h1.73
  text "P" at 141.367,-177.932 h1.73
  text "E" at 142.096,-177.932 h1.73
  text "C" at 142.826,-177.932 h1.73
  text "I" at 143.636,-177.932 h1.73
  text "F" at 144.041,-177.932 h1.73
  text "I" at 144.689,-177.932 h1.73
  text "E" at 145.095,-177.932 h1.73
  text "D" at 145.824,-177.932 h1.73
  text "T" at 147.039,-177.932 h1.73
  text "O" at 147.769,-177.932 h1.73
  text "L" at 148.741,-177.932 h1.73
  text "E" at 149.389,-177.932 h1.73
  text "R" at 150.118,-177.932 h1.73
  text "A" at 150.929,-177.932 h1.73
  text "N" at 151.739,-177.932 h1.73
  text "C" at 152.711,-177.932 h1.73
  text "E" at 153.522,-177.932 h1.73
  text "S" at 154.251,-177.932 h1.73
  text "A" at 155.223,-177.932 h1.73
  text "R" at 156.034,-177.932 h1.73
  text "E" at 156.844,-177.932 h1.73
  text "A" at 157.897,-177.932 h1.73
  text "C" at 158.708,-177.932 h1.73
  text "C" at 159.518,-177.932 h1.73
  text "O" at 160.328,-177.932 h1.73
  text "R" at 161.301,-177.932 h1.73
  text "D" at 162.111,-177.932 h1.73
  text "I" at 163.002,-177.932 h1.73
  text "N" at 163.407,-177.932 h1.73
  text "G" at 164.38,-177.932 h1.73
  text "T" at 165.595,-177.932 h1.73
  text "O" at 166.324,-177.932 h1.73
  text "I" at 167.621,-177.932 h1.73
  text "P" at 168.026,-177.932 h1.73
  text "C" at 168.755,-177.932 h1.73
  text "-" at 169.566,-177.932 h1.73
  text "A" at 170.052,-177.932 h1.73
  text "-" at 170.862,-177.932 h1.73
  text "6" at 171.348,-177.932 h1.73
  text "0" at 172.078,-177.932 h1.73
  text "0" at 172.807,-177.932 h1.73
  text "C" at 173.86,-177.932 h1.73
  text "L" at 174.671,-177.932 h1.73
  text "A" at 175.319,-177.932 h1.73
  text "S" at 176.129,-177.932 h1.73
  text "S" at 176.777,-177.932 h1.73
  text "2" at 177.75,-177.932 h1.73
  text "(" at 178.803,-177.932 h1.73
  text "F" at 179.208,-177.932 h1.73
  text "O" at 179.857,-177.932 h1.73
  text "R" at 180.829,-177.932 h1.73
  text "R" at 181.963,-177.932 h1.73
  text "I" at 182.774,-177.932 h1.73
  text "G" at 183.179,-177.932 h1.73
  text "I" at 184.07,-177.932 h1.73
  text "D" at 184.475,-177.932 h1.73
  text "P" at 185.691,-177.932 h1.73
  text "C" at 186.42,-177.932 h1.73
  text "B" at 187.23,-177.932 h1.73
  text ")" at 188.041,-177.932 h1.73
  text "o" at 188.77,-177.932 h1.73
  text "r" at 189.58,-177.932 h1.73
  text "I" at 190.39,-177.932 h1.73
  text "P" at 190.796,-177.932 h1.73
  text "C" at 191.525,-177.932 h1.73
  text "-" at 192.335,-177.932 h1.73
  text "6" at 192.821,-177.932 h1.73
  text "0" at 193.551,-177.932 h1.73
  text "1" at 194.28,-177.932 h1.73
  text "3" at 195.009,-177.932 h1.73
  text "A" at 195.738,-177.932 h1.73
  text "(" at 196.873,-177.932 h1.73
  text "F" at 197.278,-177.932 h1.73
  text "O" at 197.926,-177.932 h1.73
  text "R" at 198.899,-177.932 h1.73
  text "F" at 200.033,-177.932 h1.73
  text "L" at 200.681,-177.932 h1.73
  text "E" at 201.33,-177.932 h1.73
  text "X" at 202.059,-177.932 h1.73
  text "A" at 203.112,-177.932 h1.73
  text "N" at 203.923,-177.932 h1.73
  text "D" at 204.895,-177.932 h1.73
  text "F" at 206.11,-177.932 h1.73
  text "L" at 206.759,-177.932 h1.73
  text "E" at 207.407,-177.932 h1.73
  text "X" at 208.136,-177.932 h1.73
  text "-" at 208.865,-177.932 h1.73
  text "R" at 209.352,-177.932 h1.73
  text "I" at 210.162,-177.932 h1.73
  text "G" at 210.567,-177.932 h1.73
  text "I" at 211.458,-177.932 h1.73
  text "D" at 211.864,-177.932 h1.73
  text "P" at 138.774,-179.877 h1.73
  text "C" at 139.503,-179.877 h1.73
  text "B" at 140.314,-179.877 h1.73
  text ")" at 141.124,-179.877 h1.73
  text "I" at 138.774,-182.794 h1.73
  text "F" at 139.179,-182.794 h1.73
  text "A" at 140.152,-182.794 h1.73
  text "N" at 140.962,-182.794 h1.73
  text "Y" at 141.934,-182.794 h1.73
  text "O" at 142.988,-182.794 h1.73
  text "F" at 143.96,-182.794 h1.73
  text "T" at 144.932,-182.794 h1.73
  text "H" at 145.662,-182.794 h1.73
  text "E" at 146.553,-182.794 h1.73
  text "C" at 147.606,-182.794 h1.73
  text "O" at 148.417,-182.794 h1.73
  text "P" at 149.389,-182.794 h1.73
  text "P" at 150.118,-182.794 h1.73
  text "E" at 150.848,-182.794 h1.73
  text "R" at 151.577,-182.794 h1.73
  text "E" at 152.711,-182.794 h1.73
  text "L" at 153.441,-182.794 h1.73
  text "E" at 154.089,-182.794 h1.73
  text "M" at 154.818,-182.794 h1.73
  text "E" at 156.034,-182.794 h1.73
  text "N" at 156.763,-182.794 h1.73
  text "T" at 157.735,-182.794 h1.73
  text "S" at 158.465,-182.794 h1.73
  text "I" at 159.437,-182.794 h1.73
  text "N" at 159.842,-182.794 h1.73
  text "T" at 160.814,-182.794 h1.73
  text "E" at 161.544,-182.794 h1.73
  text "R" at 162.273,-182.794 h1.73
  text "S" at 163.083,-182.794 h1.73
  text "E" at 163.731,-182.794 h1.73
  text "C" at 164.461,-182.794 h1.73
  text "T" at 165.271,-182.794 h1.73
  text "S" at 166,-182.794 h1.73
  text "W" at 166.973,-182.794 h1.73
  text "I" at 168.269,-182.794 h1.73
  text "T" at 168.674,-182.794 h1.73
  text "H" at 169.404,-182.794 h1.73
  text "T" at 170.619,-182.794 h1.73
  text "H" at 171.348,-182.794 h1.73
  text "E" at 172.24,-182.794 h1.73
  text "B" at 173.293,-182.794 h1.73
  text "O" at 174.103,-182.794 h1.73
  text "A" at 175.076,-182.794 h1.73
  text "R" at 175.886,-182.794 h1.73
  text "D" at 176.696,-182.794 h1.73
  text "O" at 177.912,-182.794 h1.73
  text "U" at 178.884,-182.794 h1.73
  text "T" at 179.857,-182.794 h1.73
  text "L" at 180.586,-182.794 h1.73
  text "I" at 181.234,-182.794 h1.73
  text "N" at 181.639,-182.794 h1.73
  text "E" at 182.612,-182.794 h1.73
  text "," at 183.341,-182.794 h1.73
  text "S" at 183.989,-182.794 h1.73
  text "H" at 184.637,-182.794 h1.73
  text "A" at 185.529,-182.794 h1.73
  text "V" at 186.339,-182.794 h1.73
  text "E" at 187.149,-182.794 h1.73
  text "I" at 188.203,-182.794 h1.73
  text "T" at 188.608,-182.794 h1.73
  text "A" at 189.661,-182.794 h1.73
  text "N" at 190.472,-182.794 h1.73
  text "D" at 191.444,-182.794 h1.73
  text "K" at 192.659,-182.794 h1.73
  text "E" at 193.389,-182.794 h1.73
  text "E" at 194.118,-182.794 h1.73
  text "P" at 194.847,-182.794 h1.73
  text "I" at 195.901,-182.794 h1.73
  text "T" at 196.306,-182.794 h1.73
  text "F" at 197.359,-182.794 h1.73
  text "R" at 198.007,-182.794 h1.73
  text "O" at 198.818,-182.794 h1.73
  text "M" at 199.79,-182.794 h1.73
  text "T" at 201.33,-182.794 h1.73
  text "H" at 202.059,-182.794 h1.73
  text "E" at 202.95,-182.794 h1.73
  text "O" at 204.004,-182.794 h1.73
  text "U" at 204.976,-182.794 h1.73
  text "T" at 205.948,-182.794 h1.73
  text "L" at 206.678,-182.794 h1.73
  text "I" at 207.326,-182.794 h1.73
  text "N" at 207.731,-182.794 h1.73
  text "E" at 208.703,-182.794 h1.73
  text "(" at 209.757,-182.794 h1.73
  text "M" at 210.162,-182.794 h1.73
  text "A" at 211.377,-182.794 h1.73
  text "X" at 212.188,-182.794 h1.73
  text "." at 212.917,-182.794 h1.73
  text "0" at 138.774,-184.739 h1.73
  text "." at 139.503,-184.739 h1.73
  text "3" at 139.909,-184.739 h1.73
  text "M" at 140.962,-184.739 h1.73
  text "M" at 142.177,-184.739 h1.73
  text "F" at 143.717,-184.739 h1.73
  text "O" at 144.365,-184.739 h1.73
  text "R" at 145.338,-184.739 h1.73
  text "R" at 146.472,-184.739 h1.73
  text "O" at 147.282,-184.739 h1.73
  text "U" at 148.255,-184.739 h1.73
  text "T" at 149.227,-184.739 h1.73
  text "I" at 149.956,-184.739 h1.73
  text "N" at 150.361,-184.739 h1.73
  text "G" at 151.334,-184.739 h1.73
  text "," at 152.225,-184.739 h1.73
  text "M" at 152.873,-184.739 h1.73
  text "A" at 154.089,-184.739 h1.73
  text "X" at 154.899,-184.739 h1.73
  text "." at 155.628,-184.739 h1.73
  text "0" at 156.358,-184.739 h1.73
  text "." at 157.087,-184.739 h1.73
  text "5" at 157.492,-184.739 h1.73
  text "M" at 158.546,-184.739 h1.73
  text "M" at 159.761,-184.739 h1.73
  text "F" at 161.301,-184.739 h1.73
  text "O" at 161.949,-184.739 h1.73
  text "R" at 162.921,-184.739 h1.73
  text "V" at 164.056,-184.739 h1.73
  text "-" at 164.866,-184.739 h1.73
  text "S" at 165.352,-184.739 h1.73
  text "C" at 166,-184.739 h1.73
  text "O" at 166.811,-184.739 h1.73
  text "R" at 167.783,-184.739 h1.73
  text "I" at 168.593,-184.739 h1.73
  text "N" at 168.998,-184.739 h1.73
  text "G" at 169.971,-184.739 h1.73
  text ")" at 170.862,-184.739 h1.73
  text "." at 171.267,-184.739 h1.73
  text "D" at 138.774,-187.656 h1.73
  text "O" at 139.665,-187.656 h1.73
  text "N" at 140.962,-187.656 h1.73
  text "O" at 141.934,-187.656 h1.73
  text "T" at 142.907,-187.656 h1.73
  text "P" at 143.96,-187.656 h1.73
  text "L" at 144.689,-187.656 h1.73
  text "A" at 145.338,-187.656 h1.73
  text "C" at 146.148,-187.656 h1.73
  text "E" at 146.958,-187.656 h1.73
  text "A" at 148.012,-187.656 h1.73
  text "N" at 148.822,-187.656 h1.73
  text "Y" at 149.794,-187.656 h1.73
  text "C" at 150.848,-187.656 h1.73
  text "O" at 151.658,-187.656 h1.73
  text "P" at 152.63,-187.656 h1.73
  text "P" at 153.36,-187.656 h1.73
  text "E" at 154.089,-187.656 h1.73
  text "R" at 154.818,-187.656 h1.73
  text "S" at 155.953,-187.656 h1.73
  text "H" at 156.601,-187.656 h1.73
  text "A" at 157.492,-187.656 h1.73
  text "P" at 158.302,-187.656 h1.73
  text "E" at 159.032,-187.656 h1.73
  text "S" at 159.761,-187.656 h1.73
  text "A" at 160.733,-187.656 h1.73
  text "R" at 161.544,-187.656 h1.73
  text "O" at 162.354,-187.656 h1.73
  text "U" at 163.326,-187.656 h1.73
  text "N" at 164.299,-187.656 h1.73
  text "D" at 165.271,-187.656 h1.73
  text "T" at 166.487,-187.656 h1.73
  text "H" at 167.216,-187.656 h1.73
  text "E" at 168.107,-187.656 h1.73
  text "F" at 169.161,-187.656 h1.73
  text "I" at 169.809,-187.656 h1.73
  text "D" at 170.214,-187.656 h1.73
  text "U" at 171.105,-187.656 h1.73
  text "C" at 172.078,-187.656 h1.73
  text "I" at 172.888,-187.656 h1.73
  text "A" at 173.293,-187.656 h1.73
  text "L" at 174.103,-187.656 h1.73
  text "M" at 175.076,-187.656 h1.73
  text "A" at 176.291,-187.656 h1.73
  text "R" at 177.101,-187.656 h1.73
  text "K" at 177.912,-187.656 h1.73
  text "S" at 178.641,-187.656 h1.73
  text "I" at 179.613,-187.656 h1.73
  text "N" at 180.019,-187.656 h1.73
  text "1" at 181.315,-187.656 h1.73
  text "0" at 182.044,-187.656 h1.73
  text "M" at 183.098,-187.656 h1.73
  text "M" at 184.313,-187.656 h1.73
  text "R" at 185.853,-187.656 h1.73
  text "A" at 186.663,-187.656 h1.73
  text "D" at 187.473,-187.656 h1.73
  text "I" at 188.365,-187.656 h1.73
  text "U" at 188.77,-187.656 h1.73
  text "S" at 189.742,-187.656 h1.73
  text "O" at 190.715,-187.656 h1.73
  text "N" at 191.687,-187.656 h1.73
  text "T" at 192.983,-187.656 h1.73
  text "H" at 193.713,-187.656 h1.73
  text "E" at 194.604,-187.656 h1.73
  text "B" at 195.657,-187.656 h1.73
  text "R" at 196.468,-187.656 h1.73
  text "E" at 197.278,-187.656 h1.73
  text "A" at 198.007,-187.656 h1.73
  text "K" at 198.818,-187.656 h1.73
  text "A" at 199.547,-187.656 h1.73
  text "W" at 200.357,-187.656 h1.73
  text "A" at 201.654,-187.656 h1.73
  text "Y" at 202.464,-187.656 h1.73
  text "A" at 203.517,-187.656 h1.73
  text "R" at 204.328,-187.656 h1.73
  text "E" at 205.138,-187.656 h1.73
  text "A" at 205.867,-187.656 h1.73
  text "S" at 206.678,-187.656 h1.73
  text "E" at 138.774,-190.492 h1.73
  text "L" at 139.503,-190.492 h1.73
  text "E" at 140.152,-190.492 h1.73
  text "C" at 140.881,-190.492 h1.73
  text "T" at 141.691,-190.492 h1.73
  text "R" at 142.421,-190.492 h1.73
  text "I" at 143.231,-190.492 h1.73
  text "C" at 143.636,-190.492 h1.73
  text "A" at 144.446,-190.492 h1.73
  text "L" at 145.257,-190.492 h1.73
  text "T" at 146.229,-190.492 h1.73
  text "E" at 146.958,-190.492 h1.73
  text "S" at 147.687,-190.492 h1.73
  text "T" at 148.336,-190.492 h1.73
  text "R" at 149.389,-190.492 h1.73
  text "E" at 150.199,-190.492 h1.73
  text "Q" at 150.929,-190.492 h1.73
  text "U" at 151.901,-190.492 h1.73
  text "I" at 152.873,-190.492 h1.73
  text "R" at 153.279,-190.492 h1.73
  text "E" at 154.089,-190.492 h1.73
  text "D" at 154.818,-190.492 h1.73
  text "P" at 138.774,-193.328 h1.73
  text "C" at 139.503,-193.328 h1.73
  text "B" at 140.314,-193.328 h1.73
  text "S" at 141.448,-193.328 h1.73
  text "H" at 142.096,-193.328 h1.73
  text "A" at 142.988,-193.328 h1.73
  text "L" at 143.798,-193.328 h1.73
  text "L" at 144.446,-193.328 h1.73
  text "M" at 145.419,-193.328 h1.73
  text "E" at 146.634,-193.328 h1.73
  text "E" at 147.363,-193.328 h1.73
  text "T" at 148.093,-193.328 h1.73
  text "T" at 149.146,-193.328 h1.73
  text "H" at 149.875,-193.328 h1.73
  text "E" at 150.767,-193.328 h1.73
  text "R" at 151.82,-193.328 h1.73
  text "O" at 152.63,-193.328 h1.73
  text "H" at 153.603,-193.328 h1.73
  text "S" at 154.494,-193.328 h1.73
  text "D" at 155.466,-193.328 h1.73
  text "I" at 156.358,-193.328 h1.73
  text "R" at 156.763,-193.328 h1.73
  text "E" at 157.573,-193.328 h1.73
  text "C" at 158.302,-193.328 h1.73
  text "T" at 159.113,-193.328 h1.73
  text "I" at 159.842,-193.328 h1.73
  text "V" at 160.247,-193.328 h1.73
  text "E" at 161.057,-193.328 h1.73